# Altium PCB LCboardPCB3.PcbDoc
Units mil, origin at the board's own origin, x right, y up, seen from the top; angles counter-clockwise.
Board outline 1690 x 3845 mil, 6 copper layers (Top Layer, Mid-Layer 1, Internal Plane 1, Internal Plane 2, Mid-Layer 2, Bottom Layer), stack 61.2 mil thick; 28 components, 47 nets, 339 pads, 0 vias.
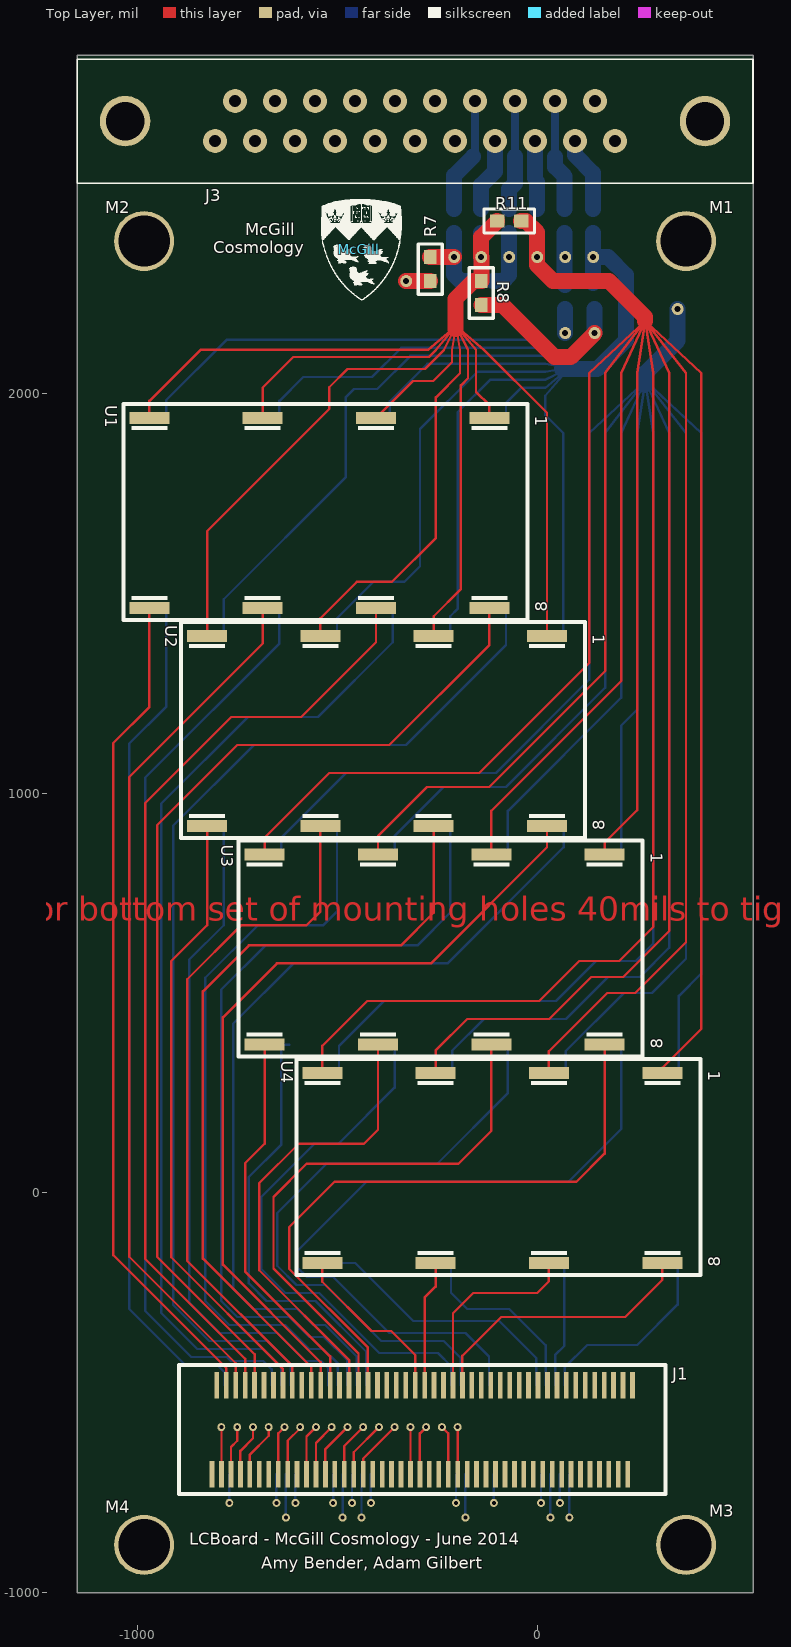
[diagram p0: Top Layer view]
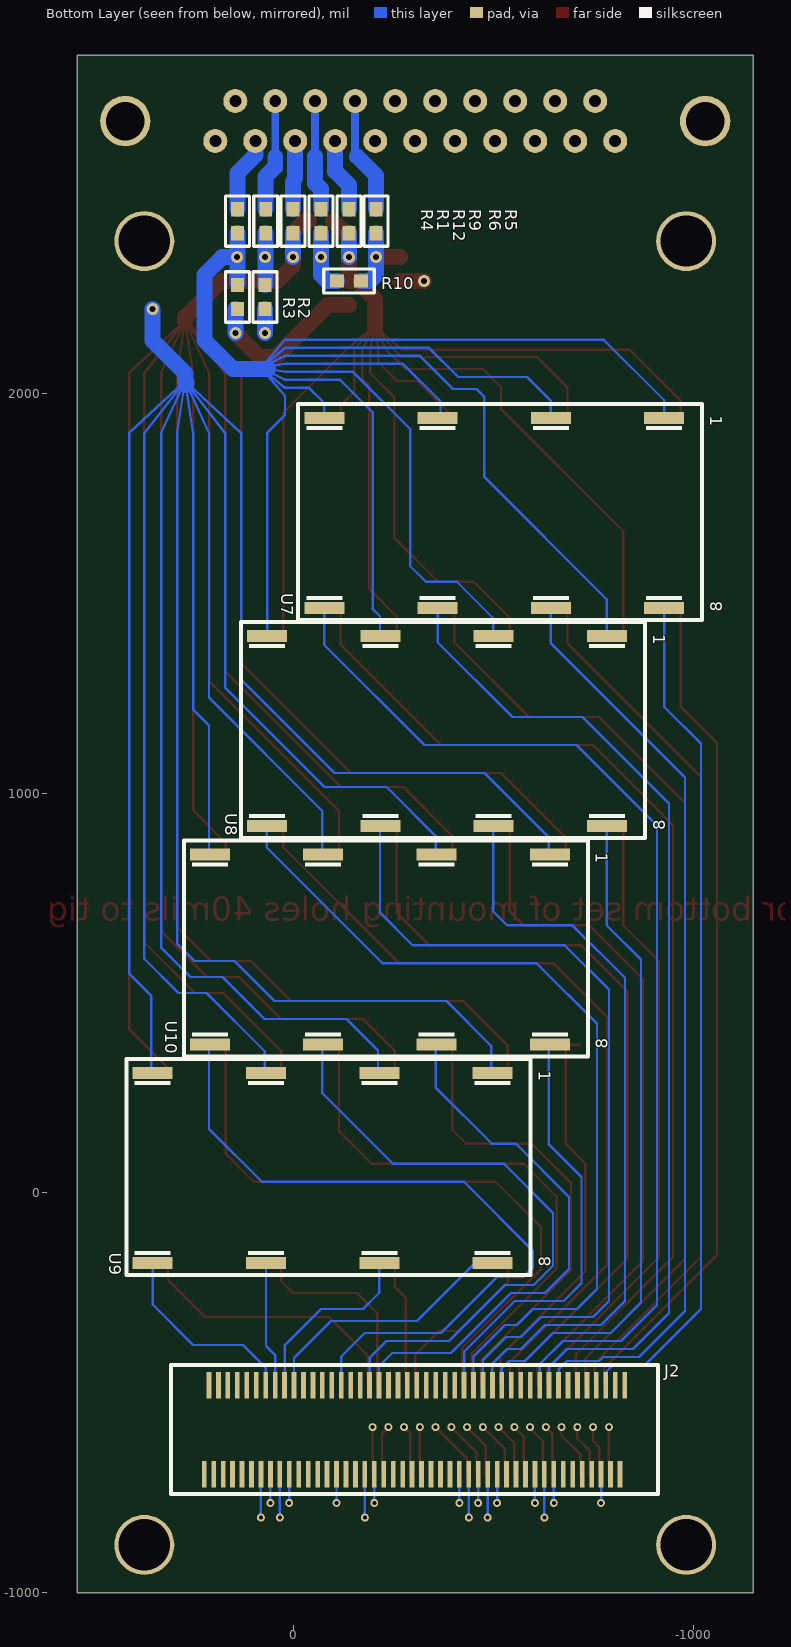
[diagram p1: Bottom Layer view, seen from below]
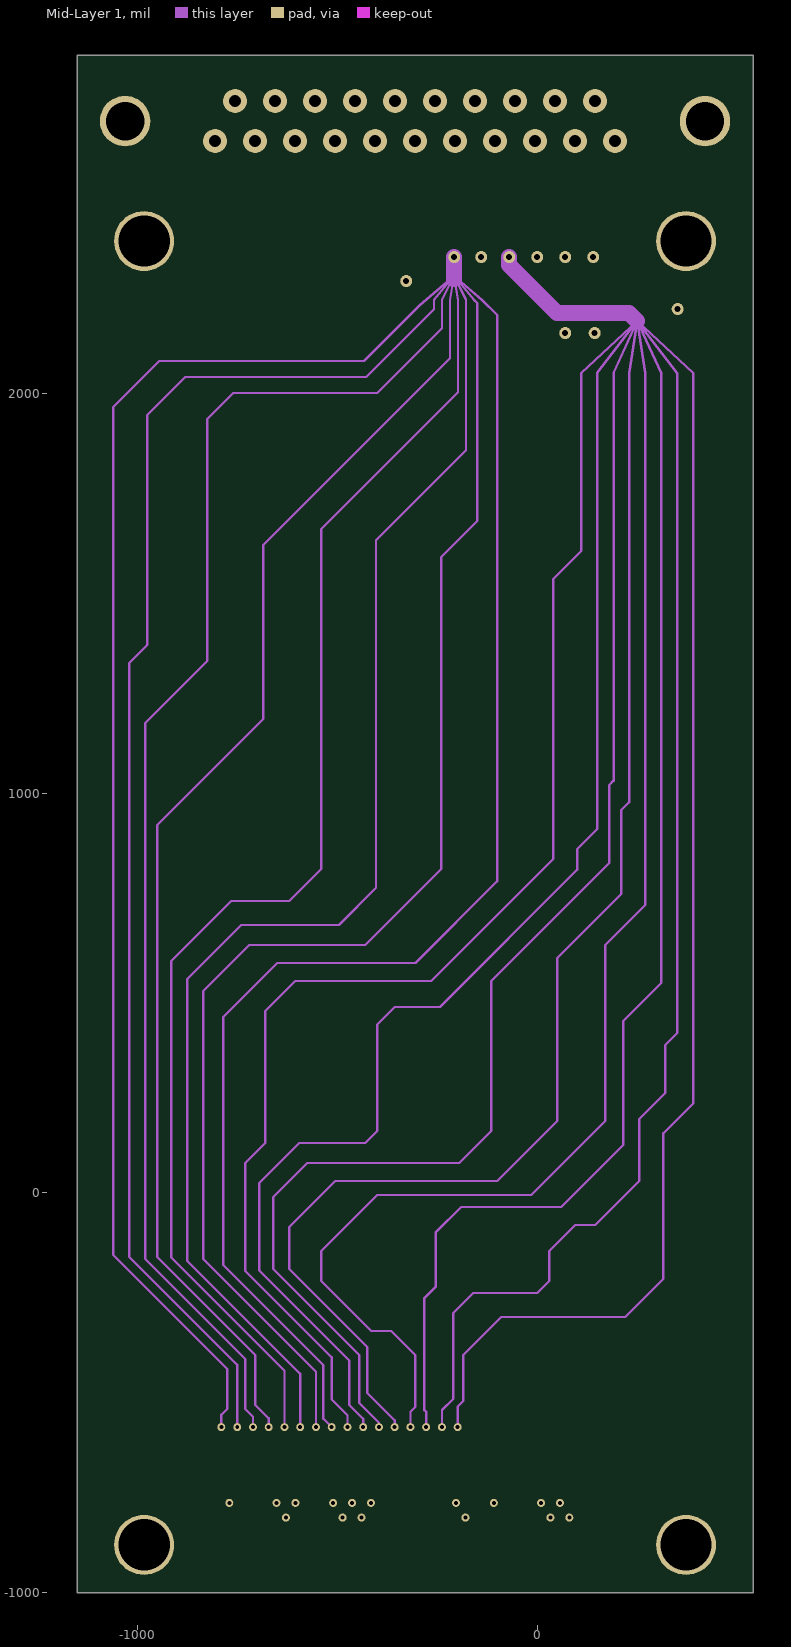
[diagram p2: Mid-Layer 1]
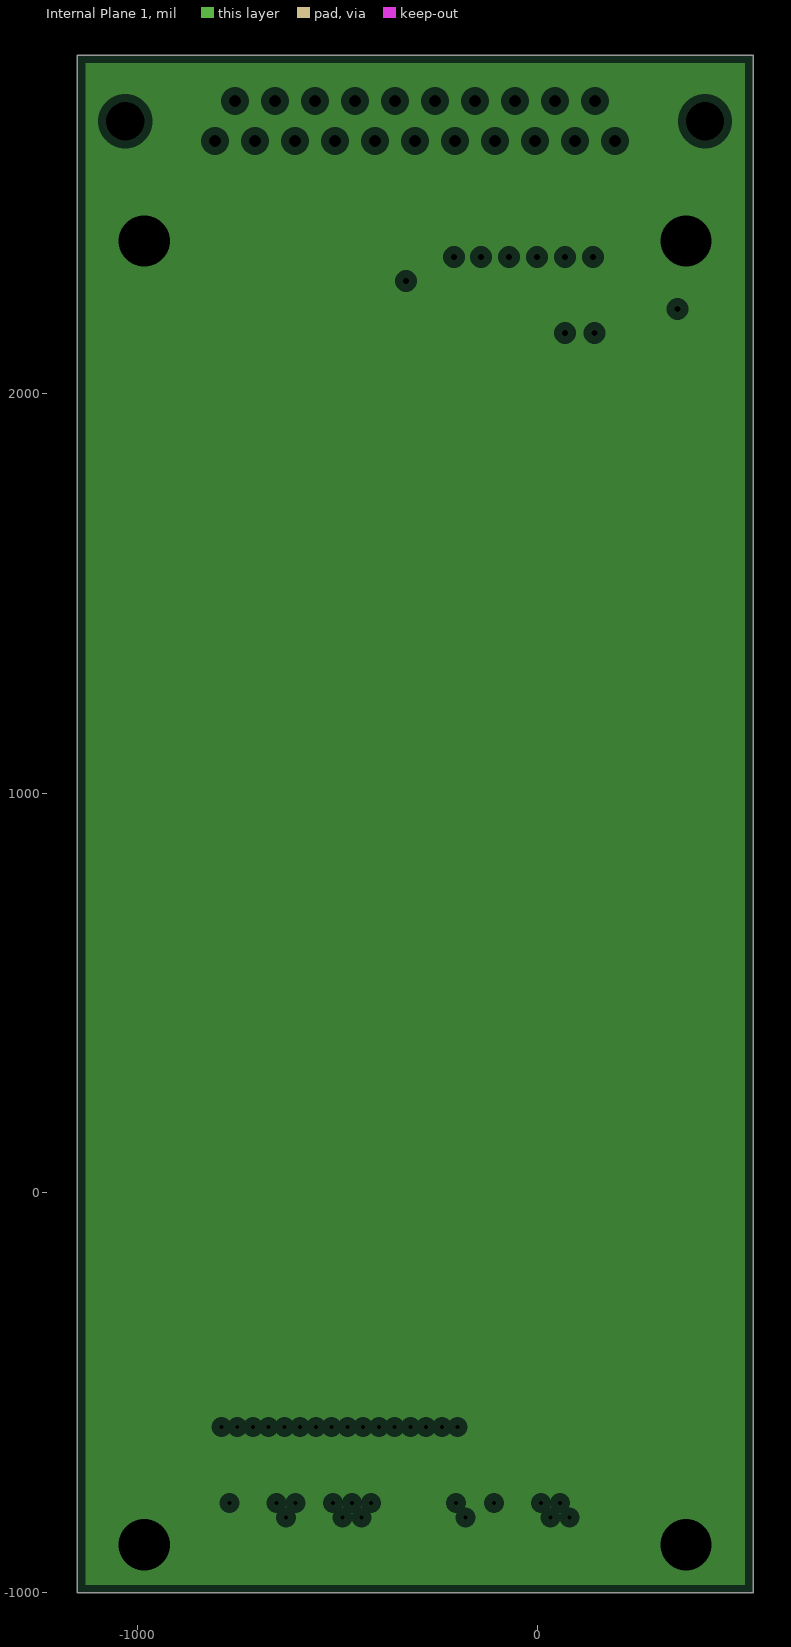
[diagram p3: Internal Plane 1, clearances drawn from the general rule]
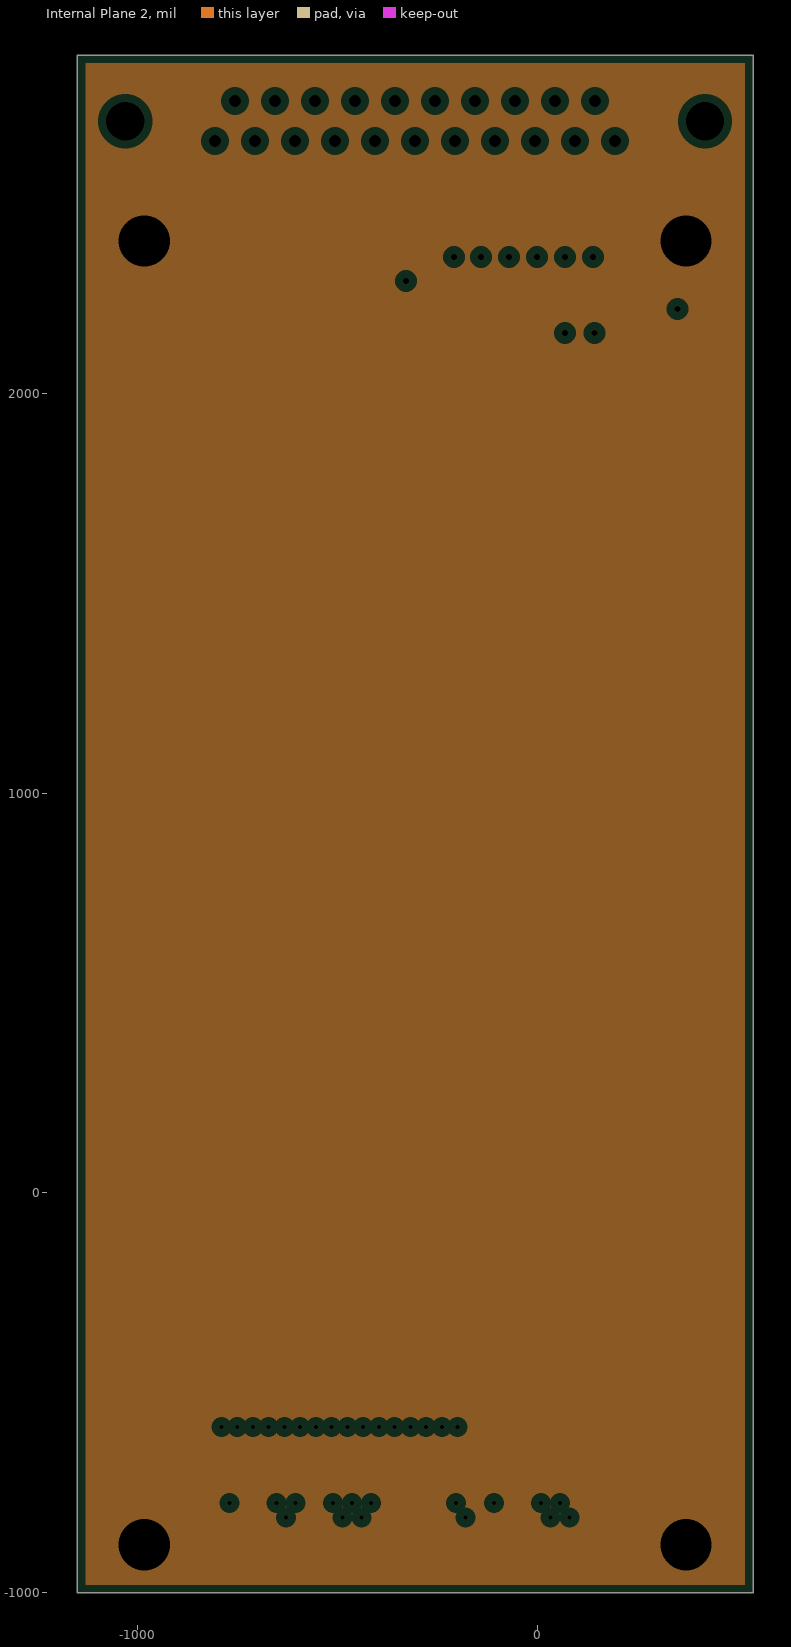
[diagram p4: Internal Plane 2, clearances drawn from the general rule]
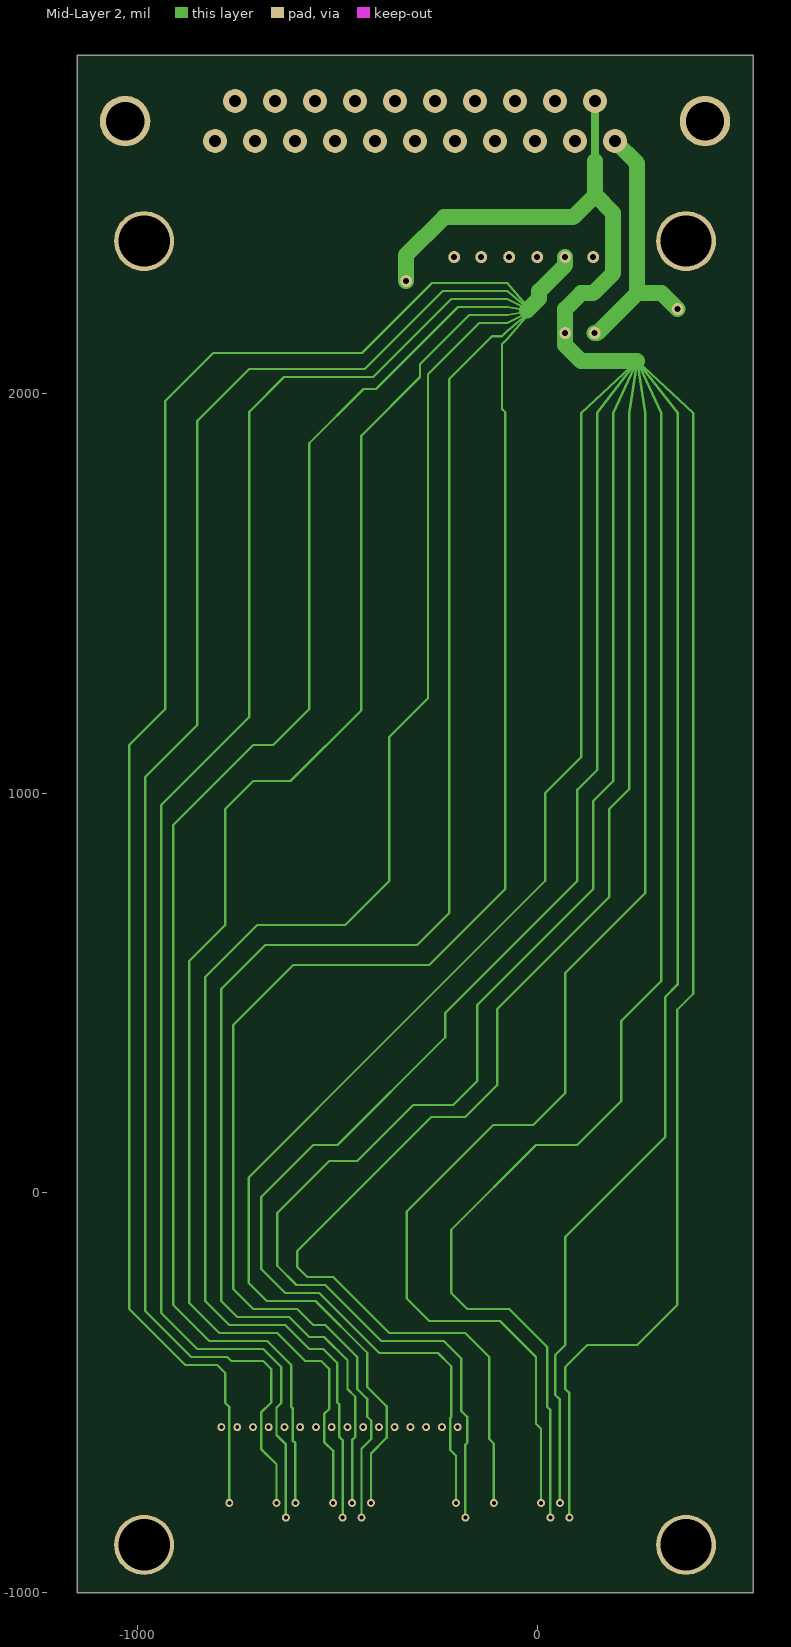
[diagram p5: Mid-Layer 2]

## Layer stack, top to bottom
Top Solder: solder mask 0.4, Solder Resist, Dk 3.5
Top Layer: signal copper 1.4
Dielectric1: core 12.6, FR-4, Dk 4.8
Mid-Layer 1: signal copper 1.4
Dielectric2: prepreg 12.6, FR-4, Dk 4.8
Internal Plane 1: plane copper 1.4, net GND
Dielectric5: core 10, FR-4, Dk 4.2
Internal Plane 2: plane copper 1.4, net GND
Dielectric 6: prepreg 5, Dk 4.2
Mid-Layer 2: signal copper 1.4
Dielectric3: core 12.6, FR-4, Dk 4.8
Bottom Layer: signal copper 1.4
Bottom Solder: solder mask 0.4, Solder Resist, Dk 3.5

## Board outline
-1150,-1000 540,-1000 540,2845 -1150,2845

## Design rules (kind name [scope] priority, off if disabled: settings)
Clearance [All] p1: gap=6
ComponentClearance [All] p1: gap=9 collisioncheckmode=3 verticalgap=10 showdistances=FALSE
HoleSize [All] p1: absolutevalues=TRUE maxlimit=200 minlimit=1 maxpercent=80.000 minpercent=20.000
HoleToHoleClearance [All] p1: gap=5 allowstackedmicrovias=TRUE
MinimumSolderMaskSliver [All] p1: minsoldermaskwidth=4
PlaneClearance [All] p1: clearance=20
PlaneConnect [All] p1: planeconnectstyle=Relief reliefexpansion=20 reliefentries=4 reliefconductorwidth=10 reliefairgap=10
PolygonConnect [All] p1: connectstyle=Relief reliefconductorwidth=10 reliefentries=4 polygonreliefangle="90 Angle" airgapwidth=10
RoutingVias [All] p1: holewidth=14.17 width=28.35 viastyle="Through Hole" minholewidth=14.17 minwidth=28.35 maxholewidth=28 maxwidth=50
SilkToSilkClearance [All] p1 off: silktosilkclearance=5
SilkToSolderMaskClearance SilkscreenOverComponentPads [IsPad] p1: minsilkscreentomaskgap=5 clearancetoexposedcopper=TRUE
SolderMaskExpansion [All] p1: expansion=3.5
UnpouredPolygon [All] p1: allowunpoured=FALSE
Width [All] p1: maxlimit=100 minlimit=6 preferedwidth=6
21 further rules are at their usual default settings.

## Classes and differential pairs
component class LCboardRev3: J3 M1 M2 M3 M4 R5 R6 R7 R8
component class S1: a6g a6h J1 R1_S1 R2_S1 R3_S1 R9 R10 R11 R12 U1 U2 u2 U3 U4
component class S2: J2 R1 R2 R3 R4 U7 U8 U9 U10

## Components (designator, comment, footprint, x,y, rotation, side; value= is the part's Value field where it differs from the comment)
J1 "ZIF Connector" LCBoard_ZIFCon#1 -813,-670 r0 top
J2 "ZIF Connector" LCBoard_ZIFCon#2 222,-670 r180 bottom
J3 "Glenair MWDM2L-21SBSP-.110" MicroD21Glenair-Vert2row 194.5,2630 r0 top
M1 "MountingHole" MountingHole 372,2380 r0 top
M2 "MountingHole" MountingHole -983,2380 r0 top
M3 "MountingHole" MountingHole 372,-880 r0 top
M4 "MountingHole" MountingHole -983,-880 r0 top
McGill "Comment" McGillLogo2 -445,2360 r0 top
R1 "0603" 0603 68.26,2400 r90 bottom
R2 "0603" 0603 70,2210 r90 bottom
R3 "0603" 0603 138.69,2270 r270 bottom
R4 "0603" 0603 139.13,2400 r90 bottom
R5 "0603" 0603 -207.48,2400 r90 bottom
R6 "0603" 0603 -140,2400 r90 bottom
R7 "0603" 0603 -267.48,2340 r270 top
R8 "0603" 0603 -139.77,2280 r270 top
R9 "0603" 0603 -70,2400 r90 bottom
R10 "0603" 0603 -170,2280 r0 bottom
R11 "0603" 0603 -40,2430 r180 top
R12 "0603" 0603 0,2400 r90 bottom
U1 "LC_wafer" LCWAFER -24.7,1513 r180 top
U2 "LC_wafer" LCWAFER 119.4,967 r180 top
U3 "LC_wafer" LCWAFER 263.5,421 r180 top
U4 "LC_wafer" LCWAFER 407.6,-125 r180 top
U7 "LC_wafer" LCWAFER -1023,1513 r0 bottom
U8 "LC_wafer" LCWAFER -880,967 r0 bottom
U9 "LC_wafer" LCWAFER -594,-125 r0 bottom
U10 "LC_wafer" LCWAFER -737,421 r0 bottom

## Footprints (in the part's own frame and the unit in brackets; to place one, negate y for a bottom-side part, rotate by r counter-clockwise, add the part's x,y. Pads: shape width x height; smd on the part's side, far side on the other; paste and mask are expansions set on the pad)
0603 [mil]
  rect 36x32 smd: 1(0,0) 2(60,0)
  silkscreen extent -33,-30 93,30
LCBoard_ZIFCon#1 [mm] "HFP190CT-ND"
  rect 0.3x1.7 smd: 1(0,-0.85) 2(0.3,4.8) 3(0.6,-0.85) 4(0.9,4.8) 5(1.2,-0.85) 6(1.5,4.8) 7(1.8,-0.85) 8(2.1,4.8) 9(2.4,-0.85) 10(2.7,4.8) 11(3,-0.85) 12(3.3,4.8) 13(3.6,-0.85) 14(3.9,4.8) 15(4.2,-0.85) 16(4.5,4.8) 17(4.8,-0.85) 18(5.1,4.8) 19(5.4,-0.85) 20(5.7,4.8) 21(6,-0.85) 22(6.3,4.8) 23(6.6,-0.85) 24(6.9,4.8) 25(7.2,-0.85) 26(7.5,4.8) 27(7.8,-0.85) 28(8.1,4.8) 29(8.4,-0.85) 30(8.7,4.8) 31(9,-0.85) 32(9.3,4.8) 33(9.6,-0.85) 34(9.9,4.8) 35(10.2,-0.85) 36(10.5,4.8) 37(10.8,-0.85) 38(11.1,4.8) 39(11.4,-0.85) 40(11.7,4.8) 41(12,-0.85) 42(12.3,4.8) 43(12.6,-0.85) 44(12.9,4.8) 45(13.2,-0.85) 46(13.5,4.8) 47(13.8,-0.85) 48(14.1,4.8) 49(14.4,-0.85) 50(14.7,4.8) 51(15,-0.85) 52(15.3,4.8) 53(15.6,-0.85) 54(15.9,4.8) 55(16.2,-0.85) 56(16.5,4.8) 57(16.8,-0.85) 58(17.1,4.8) 59(17.4,-0.85) 60(17.7,4.8) 61(18,-0.85) 62(18.3,4.8) 63(18.6,-0.85) 64(18.9,4.8) 65(19.2,-0.85) 66(19.5,4.8) 67(19.8,-0.85) 68(20.1,4.8) 69(20.4,-0.85) 70(20.7,4.8) 71(21,-0.85) 72(21.3,4.8) 73(21.6,-0.85) 74(21.9,4.8) 75(22.2,-0.85) 76(22.5,4.8) 77(22.8,-0.85) 78(23.1,4.8) 79(23.4,-0.85) 80(23.7,4.8) 81(24,-0.85) 82(24.3,4.8) 83(24.6,-0.85) 84(24.9,4.8) 85(25.2,-0.85) 86(25.5,4.8) 87(25.8,-0.85) 88(26.1,4.8) 89(26.4,-0.85) 90(26.7,4.8)
  round 0.5 on Top Overlay: 2(-2.3,-2.4)
  silkscreen extent -2.1,-2.1 28.8,6.1
LCBoard_ZIFCon#2 [mm]
  rect 0.3x1.7 smd: 1(0,-0.85) 2(0.3,4.8) 3(0.6,-0.85) 4(0.9,4.8) 5(1.2,-0.85) 6(1.5,4.8) 7(1.8,-0.85) 8(2.1,4.8) 9(2.4,-0.85) 10(2.7,4.8) 11(3,-0.85) 12(3.3,4.8) 13(3.6,-0.85) 14(3.9,4.8) 15(4.2,-0.85) 16(4.5,4.8) 17(4.8,-0.85) 18(5.1,4.8) 19(5.4,-0.85) 20(5.7,4.8) 21(6,-0.85) 22(6.3,4.8) 23(6.6,-0.85) 24(6.9,4.8) 25(7.2,-0.85) 26(7.5,4.8) 27(7.8,-0.85) 28(8.1,4.8) 29(8.4,-0.85) 30(8.7,4.8) 31(9,-0.85) 32(9.3,4.8) 33(9.6,-0.85) 34(9.9,4.8) 35(10.2,-0.85) 36(10.5,4.8) 37(10.8,-0.85) 38(11.1,4.8) 39(11.4,-0.85) 40(11.7,4.8) 41(12,-0.85) 42(12.3,4.8) 43(12.6,-0.85) 44(12.9,4.8) 45(13.2,-0.85) 46(13.5,4.8) 47(13.8,-0.85) 48(14.1,4.8) 49(14.4,-0.85) 50(14.7,4.8) 51(15,-0.85) 52(15.3,4.8) 53(15.6,-0.85) 54(15.9,4.8) 55(16.2,-0.85) 56(16.5,4.8) 57(16.8,-0.85) 58(17.1,4.8) 59(17.4,-0.85) 60(17.7,4.8) 61(18,-0.85) 62(18.3,4.8) 63(18.6,-0.85) 64(18.9,4.8) 65(19.2,-0.85) 66(19.5,4.8) 67(19.8,-0.85) 68(20.1,4.8) 69(20.4,-0.85) 70(20.7,4.8) 71(21,-0.85) 72(21.3,4.8) 73(21.6,-0.85) 74(21.9,4.8) 75(22.2,-0.85) 76(22.5,4.8) 77(22.8,-0.85) 78(23.1,4.8) 79(23.4,-0.85) 80(23.7,4.8) 81(24,-0.85) 82(24.3,4.8) 83(24.6,-0.85) 84(24.9,4.8) 85(25.2,-0.85) 86(25.5,4.8) 87(25.8,-0.85) 88(26.1,4.8) 89(26.4,-0.85) 90(26.7,4.8)
  round 0.5 on Bottom Overlay: 2(-2.3,-2.4)
  silkscreen extent -2.1,-2.1 28.8,6.1
LCWAFER [mil]
  rect 100x30 smd paste-500 mask-500: 1(95,-425) 2(378.3,-425) 3(661.6,-425) 4(944.9,-425) 5(944.9,50) 6(661.6,50) 7(378.3,50) 8(95,50)
  silkscreen extent 0,-460 1010,80
McGillLogo2 [mil] "McGillLogo"
  silkscreen extent -95,-127 106,124
MicroD21Glenair-Vert2row [mil]
  round 60 hole 30: 1(0,0) 2(-100,0) 3(-200,0) 4(-300,0) 5(-400,0) 6(-500,0) 7(-600,0) 8(-700,0) 9(-800,0) 10(-900,0) 11(-1000,0) 12(-50,100) 13(-150,100) 14(-250,100) 15(-350,100) 16(-450,100) 17(-550,100) 18(-650,100) 19(-750,100) 20(-850,100) 21(-950,100)
  round 125.98 hole 96.06: MH1(225,50) MH2(-1225,50)
  silkscreen extent -1345,-105 345,205
MountingHole [mil]
  round 150 hole 128.5: 0(0,0)

## Part data
J1 J2: library part LCboard_FH16-90S-0.3SHW(05)
J3: library part "GlenairMicroDsub21 -2 row", "GlenairMicroDsub21 -2 row"
R1 R2 R3 R4 R5 R6 R7 R8 R9 R10 R11 R12: library part Res0603, "RES 1 OHM 1/10W 1% 0603 SMD"
U1 U2 U3 U4 U7 U8 U9 U10: library part LCWafer, "Gold bonded integrated LC"

## Free pads (board coordinates)
  round 20 hole 10: 0(-790,-585.44) 0(-770,-775) 0(-750.01,-585.44) 0(-710.64,-585.44) 0(-671.27,-585.44) 0(-651.89,-775) 0(-631.9,-585.44) 0(-628.39,-811.61) 0(-604.65,-775) 0(-592.53,-585.44) 0(-553.16,-585.44) 0(-513.79,-585.44) 0(-510.16,-775) 0(-486.66,-811.61) 0(-474.42,-585.44) 0(-462.91,-775) 0(-439.42,-811.61) 0(-435.05,-585.44) 0(-415.67,-775) 0(-395.68,-585.44) 0(-356.31,-585.44) 0(-316.94,-585.44) 0(-277.57,-585.44) 0(-238.2,-585.44) 0(-203.07,-775) 0(-198.83,-585.44) 0(-179.57,-811.61) 0(-108.58,-775) 0(9.53,-775) 0(33.02,-811.61) 0(56.77,-775) 0(80.27,-811.61)
  round 30 hole 15: 0(-327.48,2280) 0(-207.48,2340) 0(-140,2340) 0(-70,2340) 0(0,2340) 0(70,2150) 0(70,2340) 0(140,2340) 0(143.69,2150) 0(350.9,2210)

## Nets (pads, with @x,y where several pads share a name; then routed paths per layer and width w, separated by ;. In a path a pad name is that pad's centre, name@x,y a point inside that pad or via, vN(x,y) a via of type N, cw(c..) or ccw(c..) an arc to the next point about the centre after c; other vN are vias at no path point)
GND: M1.0 M2.0 M3.0 M4.0
NetJ1_3: J1.3 J1.5 J1.7 J1.9 J1.15 J1.17 J1.21 J1.23 pad.0@-207.48,2340 pad.0@-513.79,-585.44 pad.0@-553.16,-585.44 pad.0@-592.53,-585.44 pad.0@-631.9,-585.44 pad.0@-671.27,-585.44 pad.0@-710.64,-585.44 pad.0@-750.01,-585.44 pad.0@-790,-585.44 R5.1 R7.1 R10.1 | length 29161.3
  Top Layer w6: J1.3 pad.0@-789.38,-585.44 ; J1.5 -765.76,-635.44 -750.01,-619.69 pad.0@-750.01,-585.44 ; J1.7 -742.13,-644.76 -710.64,-613.27 pad.0@-710.64,-585.44 ; J1.9 -718.51,-654.14 -671.27,-606.9 pad.0@-671.27,-585.44 ; J1.15 -647.65,-601.19 pad.0@-631.9,-585.44 ; J1.17 -624.02,-619.65 -592.53,-588.16 pad.0@-592.53,-585.44 ; J1.21 -576.78,-609.06 pad.0@-553.16,-585.44 ; J1.23 -553.16,-624.81 pad.0@-513.79,-585.44
  Top Layer w40: R7.1 pad.0@-207.48,2340
  Mid-Layer 1 w6: pad.0@-790,-585.44 -790,-555 -775,-540 -775,-440 -1060,-155 -1060,1965 -945,2080 -433.17,2080 -293.17,2220 -208,2293 ; pad.0@-750.01,-585.44 -750.01,-429.99 -1020,-160 -1020,1325 -975,1370 -975,1945 -880,2040 -427.48,2040 -258,2209.48 -258,2233 -208,2293 ; pad.0@-710.64,-585.44 -710.64,-559.36 -730,-540 -730,-415 -980,-165 -980,1175 -825,1330 -825,1935 -760,2000 -400,2000 -238,2162 -238,2233 -208,2293 ; pad.0@-671.27,-585.44 -671.27,-563.73 -705,-530 -705,-405 -950,-160 -950,920 -685,1185 -685,1620 -218,2087 -218,2233 -208,2293 ; pad.0@-631.9,-585.44 -631.9,-444.37 -915,-161.27 -915,580 -765,730 -620,730 -540,810 -540,1660 -198,2002 -198,2233 -207.48,2289.89 -208,2293 ; pad.0@-592.53,-585.44 -592.53,-452.47 -875,-170 -875,535 -740,670 -496,670 -403,763 -403,1632 -178,1857 -178,2233 -207.48,2291.96 -208,2293 ; pad.0@-553.16,-585.44 -553.16,-446.84 -835,-165 -835,505 -720,620 -430,620 -240,810 -240,1590 -150,1680 -150,2225 -158,2233 -207.48,2292.38 -208,2293 ; pad.0@-513.79,-585.44 -535,-564.23 -535,-430 -785,-180 -785,440 -650,575 -304.7,575 -100,779.7 -100,2195 -138,2233 -207.48,2292.56 -208,2293
  Mid-Layer 1 w40: -207.48,2285 pad.0@-207.48,2340
  Bottom Layer w40: R5.1 -207.48,2340 -207.48,2296.1 -191.39,2280 R10.1
NetJ1_4: J1.4 U1.5 | length 2098.5
  Top Layer w6: U1.5 -969.6,1215.4 -1060,1125 -1060,-155.5 -777.57,-437.93 J1.4
NetJ1_6: J1.6 U1.6 | length 2192.5
  Top Layer w6: J1.6 -753.94,-425.66 -1020,-159.6 -1020,1040 -686.3,1373.7 U1.6
NetJ1_8: J1.8 U1.7 | length 2389
  Top Layer w6: J1.8 -730.32,-414.68 -980,-165 -980,975 -765,1190 -590,1190 -403,1377 U1.7
NetJ1_10: J1.10 U1.8 | length 2611.3
  Top Layer w6: J1.10 -706.7,-403.3 -950,-160 -950,920 -750,1120 -370,1120 -119.7,1370.3 U1.8
NetJ1_16: J1.16 U2.5 | length 1550.7
  Top Layer w6: U2.5 -825.5,669.4 -915,579.9 -915,-160.83 -635.83,-440 J1.16
NetJ1_18: J1.18 U2.6 | length 1740.3
  Top Layer w6: J1.18 -612.21,-432.79 -875,-170 -875,534.5 -740.5,669 -577.3,669 -542.2,704.1 U2.6
NetJ1_22: J1.22 U2.7 | length 1971.8
  Top Layer w6: J1.22 -564.97,-435.03 -835.9,-164.1 -835.9,504 -720.9,619 -340.9,619 -258.9,701 U2.7
NetJ1_24: J1.24 U2.8 | length 2060.4
  Top Layer w6: J1.24 -541.35,-423.65 -785.9,-179.1 -785.9,439 -650.9,574 -266,574 24.4,864.4 U2.8
NetJ1_25: J1.25 J1.29 J1.31 J1.33 J1.43 J1.45 J1.51 J1.53 pad.0@-70,2340 pad.0@-198.83,-585.44 pad.0@-238.2,-585.44 pad.0@-277.57,-585.44 pad.0@-316.94,-585.44 pad.0@-356.31,-585.44 pad.0@-395.68,-585.44 pad.0@-435.05,-585.44 pad.0@-474.42,-585.44 R9.1 R10.2 | length 28485.3
  Top Layer w6: J1.25 -529.54,-640.56 pad.0@-474.42,-585.44 ; J1.29 -482.29,-632.68 pad.0@-435.05,-585.44 ; J1.31 -458.67,-648.43 pad.0@-395.68,-585.44 ; J1.33 -435.05,-664.18 pad.0@-356.31,-585.44 ; J1.43 pad.0@-316.94,-585.44 ; J1.45 -293.32,-601.19 pad.0@-277.57,-585.44 ; pad.0@-238.2,-585.44 -222.45,-601.19 J1.51 ; J1.53 pad.0@-198.83,-585.44
  Mid-Layer 1 w6: pad.0@-474.42,-585.44 -474.42,-555.58 -513.79,-516.21 -513.79,-411.21 -730,-195 -730,75 -680,125 -680,455 -605,530 -265,530 40,835 40,1535 110,1605 110,2050 250,2180 ; pad.0@-435.05,-585.44 -435.05,-564.95 -470,-530 -470,-418.79 -695,-193.79 -695,25 -595,125 -430,125 -400,155 -400,421.31 -356.31,465 -243.4,465 100,808.4 100,860 150,910 150,2050 250,2180 ; pad.0@-395.68,-585.44 -395.68,-574.32 -445,-525 -445,-405 -660,-190 -660,-10 -575,75 -195,75 -115,155 -115,530 180,825 180,1020 190.94,1030.94 190.94,2050 250,2180 ; pad.0@-356.31,-585.44 -356.31,-568.69 -425,-500 -425,-385 -620,-190 -620,-85 -505,30 -100,30 50,180 50,587.4 210,747.4 210,957.1 230,977.1 230,2050 250,2180 ; pad.0@-316.94,-585.44 -316.94,-546.94 -305,-535 -305,-405 -365,-345 -415,-345 -540,-220 -540,-145 -400,-5 -15,-5 170,180 170,620 270,720 270,2050 250,2180 ; pad.0@-277.57,-585.44 -277.57,-547.43 -282,-543 -282,-263 -254,-235 -254,-99 -190,-35 60,-35 215,120 215,430 310,525 310,2050 250,2180 ; pad.0@-238.2,-585.44 -238.2,-543 -210,-514.8 -210,-300 -160,-250 0,-250 30,-220 30,-145 95,-80 145,-80 255,30 255,185 320,250 320,370 350,400 350,2050 250,2180 ; pad.0@-198.83,-585.44 -198.83,-533.83 -185,-520 -185,-405 -90,-310 220,-310 315,-215 315,149.1 390,224.1 390,2050 250,2180
  Mid-Layer 1 w40: pad.0@-70,2340 -70,2319.53 49.53,2200 230,2200 250,2180
  Bottom Layer w40: R10.2 -85.09,2280 -70,2295.09 -70,2340 R9.1
NetJ1_26: J1.26 U3.5 | length 1015.3
  Top Layer w6: U3.5@-716.4,371 U3.5@-661.4,371 ; U3.5 -681.4,123.4 -730.32,74.48 -730.32,-196.08 -517.72,-408.68 J1.26
NetJ1_30: J1.30 U3.6 | length 1163.5
  Top Layer w6: J1.30 -470.48,-417.74 -694.89,-193.33 -694.89,24.51 -596.4,123 -433.2,123 -398.1,158.1 U3.6
NetJ1_32: J1.32 U3.7 | length 1388.3
  Top Layer w6: J1.32 -446.86,-401.14 -659.46,-188.54 -659.46,-9.66 -576.8,73 -196.8,73 -114.8,155 U3.7
NetJ1_34: J1.34 U3.8 | length 1614.5
  Top Layer w6: J1.34 -423.24,-386.76 -620,-190 -620,-85.2 -506.8,28 98.2,28 168.5,98.3 U3.8
NetJ1_44: J1.44 U4.5 | length 430.9
  Top Layer w6: U4.5 -537.3,-221.8 -414.1,-345 -365.13,-345 -305.13,-405 J1.44
NetJ1_46: J1.46 U4.6 | length 317.4
  Top Layer w6: J1.46 -281.5,-261.5 -254,-234 U4.6
NetJ1_52: J1.52 U4.7 | length 499.1
  Top Layer w6: J1.52 -210.64,-300.64 -160,-250 0,-250 29.3,-220.7 U4.7
NetJ1_54: J1.54 U4.8 | length 694.6
  Top Layer w6: J1.54 -187.02,-407.02 -90,-310 220,-310 312.6,-217.4 U4.8
NetJ2_13: J2.13 J2.15 J2.17 J2.19 J2.29 J2.35 J2.37 J2.55 J3.12 pad.0@9.53,-775 pad.0@33.02,-811.61 pad.0@56.77,-775 pad.0@70,2150 pad.0@80.27,-811.61 pad.0@-108.58,-775 pad.0@-179.57,-811.61 pad.0@-203.07,-775 pad.0@-327.48,2280 pad.0@-415.67,-775 R2.1 R7.2 | length 29620.9
  Top Layer w40: pad.0@-327.48,2280 R7.2
  Mid-Layer 2 w6: pad.0@-415.67,-775 -415.67,-651.02 -376.68,-612.03 -376.68,-533.32 -425,-485 -425,-399.42 -554.42,-270 -676.4,-270 -721.3,-225.1 -721.3,38.7 -550,210 -550,210.7 20,780.7 20,1000 110,1090 110,1950 250,2080 ; pad.0@-203.07,-775 -203.07,-656.93 -217.83,-642.17 -217.83,-562.83 -215,-560 -215,-433.2 -248.2,-400 -395,-400 -545,-250 -630,-250 -690,-190 -690,-10 -560,120 -499.42,120 -230,389.42 -230,450 100,780 100,1007.92 150,1057.92 150,1950 250,2080 ; pad.0@-179.57,-811.61 -179.57,-629.57 -175,-625 -175,-560 -190,-545 -190,-413.83 -233.83,-370 -390,-370 -530,-230 -601.9,-230 -650,-181.9 -650,-50 -520,80 -450,80 -310,220 -210,220 -150,280 -150,470 140,760 140,980 190,1030 190,1950 250,2080 ; pad.0@-108.58,-775 -108.58,-626.42 -120,-615 -120,-410 -180,-350 -370.1,-350 -510.1,-210 -575,-210 -600,-185 -600,-145 -265,190 -180,190 -100,270 -100,460 180,740 180,960 230,1010 230,1950 250,2080 ; pad.0@9.53,-775 9.53,-589.53 -3,-577 -3,-410 -93,-320 -270,-320 -326.4,-263.6 -326.4,-46.4 -110,170 -10,170 70,250 70,550 270,750 270,1950 250,2080 ; pad.0@33.02,-811.61 33.02,-543.02 25,-535 25,-385 -70,-290 -175,-290 -215,-250 -215,-92 -3,120 100,120 210,230 210,430 310,530 310,1950 250,2080 ; pad.0@56.77,-775 56.77,-516.77 45,-505 45,-405 70,-380 70,-110 320,140 320,490 350.9,520.9 350.9,1951.4 250,2080 ; pad.0@80.27,-811.61 80.27,-500.27 70,-490 70,-435 125,-380 250,-380 350,-280 350,458 390,498 390,1950 250,2080
  Mid-Layer 2 w20: 144.5,2580 J3.12
  Mid-Layer 2 w40: pad.0@-327.48,2280 -327.48,2345.52 -233,2440 90,2440 144.5,2494.5 144.5,2495.5 ; 144.5,2580 144.5,2495.5 ; 250,2080 110,2080 70,2120 70,2150 70,2210 110,2250 140,2250 190,2300 190,2450 144.5,2495.5
  Bottom Layer w6: pad.0@-415.8,-774.87 J2.55 ; pad.0@-203.2,-774.87 J2.37 ; pad.0@-179.57,-811.61 J2.35 ; pad.0@-108.71,-774.87 J2.29 ; pad.0@9.4,-774.87 J2.19 ; pad.0@33.02,-811.61 J2.17 ; pad.0@56.65,-774.87 J2.15 ; pad.0@80.27,-811.61 J2.13
  Bottom Layer w40: pad.0@70,2150 R2.1
NetJ2_14: J2.14 U9.5 | length 496.2
  Bottom Layer w6: J2.14 68.46,-436.54 125,-380 250,-380 350.9,-279.1 U9.5
NetJ2_16: J2.16 U9.6 | length 315.5
  Bottom Layer w6: J2.16 44.83,-405 67.6,-382.23 U9.6
NetJ2_18: J2.18 U9.7 | length 465.7
  Bottom Layer w6: U9.7 -215.7,-249.3 -175,-290 -70,-290 21.21,-381.21 J2.18
NetJ2_20: J2.20 U9.8 | length 663.4
  Bottom Layer w6: U9.8 -464,-175 -455,-175 -310,-320 -95,-320 -2.41,-412.59 J2.20
NetJ2_30: J2.30 U10.5 | length 1832.3
  Bottom Layer w6: J2.30 -120.52,-408.9 -179.42,-350 -370,-350 -510,-210 -575.95,-210 -600,-185.95 -600,-145 -427,28 78,28 210.1,160.1 U10.5@210.1,371
NetJ2_36: J2.36 U10.6 | length 1576.8
  Bottom Layer w6: J2.36 -191.39,-412.44 -233.83,-370 -390,-370 -530,-230 -601.9,-230 -650,-181.9 -650,-50 -527,73 -250,73 -73.2,249.8 U10.6@-73.2,371
NetJ2_38: J2.38 U10.7 | length 1357.8
  Bottom Layer w6: U10.7@-356.5,371 -356.5,263.5 -497,123 -557,123 -690,-10 -690,-190 -630,-250 -545,-250 -395,-400 -248.2,-400 -215.01,-433.19 J2.38
NetJ2_56: J2.56 U10.8 | length 1134.1
  Bottom Layer w6: U10.8@-674.8,371 U10.8@-619.8,371 ; U10.8@-639.8,371 -639.8,121.47 -721.3,39.97 -721.3,-225.39 -676.69,-270 -554.42,-270 -427.61,-396.81 J2.56
NetJ2_57: J2.57 J2.59 J2.61 J2.63 J2.71 J2.73 J2.75 J2.85 pad.0@70,2340 pad.0@-439.42,-811.61 pad.0@-462.91,-775 pad.0@-486.66,-811.61 pad.0@-510.16,-775 pad.0@-604.65,-775 pad.0@-628.39,-811.61 pad.0@-651.89,-775 pad.0@-770,-775 R1.1 R2.2 | length 31712.5
  Mid-Layer 2 w6: pad.0@-770,-775 -770,-535 -780,-525 -780,-450 -800,-430 -880,-430 -1020,-290 -1020,1120 -930,1210 -930,1980 -810,2100 -438,2100 -263,2275 -75,2275 -20.38,2211.28 -15,2205 ; pad.0@-651.89,-775 -651.89,-678.11 -690.27,-639.73 -690.27,-549 -665,-523.73 -665,-440 -685,-420 -765,-420 -775,-410 -865,-410 -980,-295 -980,1040 -850,1170 -850,1930 -720,2060 -431.28,2060 -236.28,2255 -75,2255 -21.36,2210.3 -15,2205 ; pad.0@-628.39,-811.61 -628.39,-628.5 -651.89,-605 -651.89,-536.89 -640,-525 -640,-435 -685,-390 -850,-390 -940,-300 -940,970 -720,1190 -720,1953 -633,2040 -410,2040 -215,2235 -75,2235 -22.78,2208.89 -15,2205 ; pad.0@-604.65,-775 -604.65,-625.35 -611.53,-618.47 -611.53,-538.47 -615,-535 -615,-430 -675,-370 -820,-370 -910,-280 -910,920 -710,1120 -660,1120 -570,1210 -570,1874.42 -434.42,2010 -403,2010 -198,2215 -75,2215 -25,2206.67 -15,2205 ; pad.0@-510.16,-775 -510.16,-644.84 -532.79,-622.21 -532.79,-552.79 -520,-540 -520,-440 -540,-420 -580,-420 -650,-350 -795,-350 -870,-275 -870,580 -780,670 -780,960 -710,1030 -616.7,1030 -440,1206.7 -440,1893 -293,2040 -293,2072 -170,2195 -75,2195 -15,2205 ; pad.0@-486.66,-811.61 -486.66,-618.34 -494.79,-610.21 -494.79,-577.36 -495,-577.15 -495,-528.73 -500,-523.73 -500,-425 -535,-390 -570,-390 -630,-330 -770,-330 -830,-270 -830,540 -700,670 -480,670 -370,780 -370,1140 -273,1237 -273,2047 -145,2175 -75,2175 -15,2205 ; pad.0@-462.91,-775 -462.91,-617.91 -455,-610 -455,-509.42 -474.42,-490 -474.42,-418.37 -532.79,-360 -570,-360 -620,-310 -750,-310 -790,-270 -790,510 -680,620 -300,620 -220,700 -220,2035 -113,2142 -88,2142 -75,2155 -15,2205 ; pad.0@-439.42,-811.61 -439.42,-639.42 -415,-615 -415,-569.67 -425,-559.67 -425,-515 -450,-490 -450,-410 -530,-330 -560,-330 -600,-290 -710,-290 -760,-240 -760,420 -610,570 -270,570 -80,760 -80,1951.8 -88,1959.8 -88,2122 -75,2135 -15,2205
  Mid-Layer 2 w40: -25,2206.67 5,2236.67 5,2255 70,2320 pad.0@70,2340
  Bottom Layer w6: J2.85 -770.13,-774.87 pad.0@-770,-775 ; pad.0@-652.02,-774.87 J2.75 ; pad.0@-628.39,-811.61 J2.73 ; pad.0@-604.77,-774.87 J2.71 ; pad.0@-510.28,-774.87 J2.63 ; pad.0@-486.66,-811.61 J2.61 ; pad.0@-463.04,-774.87 J2.59 ; pad.0@-439.42,-811.61 J2.57
  Bottom Layer w40: R1.1 68.26,2271.74 R2.2
NetJ2_58: J2.58 U8.5 | length 2175.5
  Bottom Layer w6: J2.58 -451.23,-408.77 -530,-330 -560,-330 -600,-290 -710,-290 -760,-240 -760,423.3 -609.3,574 -224.4,574 66,864.4 U8.5@66,917
NetJ2_60: J2.60 U8.6 | length 2086.3
  Bottom Layer w6: J2.60 -474.85,-417.94 -532.79,-360 -570,-360 -620,-310 -750,-310 -790,-270 -790,508.3 -679.3,619 -299.3,619 -217.3,701 U8.6@-217.3,917
NetJ2_62: J2.62 U8.7 | length 1869.9
  Bottom Layer w6: U8.7@-500.6,917 -500.6,704.1 -535.7,669 -698.9,669 -830,537.9 -830,-270 -770,-330 -630,-330 -570,-390 -535,-390 -498.47,-426.53 J2.62
NetJ2_64: J2.64 U8.8 | length 1685.7
  Bottom Layer w6: U8.8@-783.9,917 -783.9,669.4 -870,583.3 -870,-274.18 -794.18,-350 -650,-350 -580,-420 -540,-420 -522.09,-437.91 J2.64
NetJ2_72: J2.72 U7.5 | length 2717.7
  Bottom Layer w6: J2.72 -616.58,-428.42 -675,-370 -820,-370 -910,-280 -910,918.4 -708.4,1120 -328.4,1120 -78.1,1370.3 U7.5
NetJ2_74: J2.74 U7.6 | length 2506.9
  Bottom Layer w6: J2.74 -640.2,-434.94 -685.15,-390 -850,-390 -940,-300 -940,973.4 -723.4,1190 -548.4,1190 -361.4,1377 U7.6
NetJ2_76: J2.76 U7.7 | length 2313.5
  Bottom Layer w6: J2.76 -663.83,-441.17 -684.85,-420.15 -765.41,-420.15 -775.56,-410 -865,-410 -980,-295 -980,1038.4 -644.7,1373.7 U7.7
NetJ2_86: J2.86 U7.8 | length 2127.6
  Bottom Layer w6: U7.8 -928,1215.4 -1020,1123.4 -1020,-290 -880,-430 -800,-430 -781.94,-448.06 J2.86
NetJ3_1: J3.1 pad.0@143.69,2150 pad.0@350.9,2210 R3.2 R8.2 U9.1 U9.2 U9.3 U9.4 U10.1 U10.2 U10.3 U10.4 | length 15372.7
  Top Layer w40: R8.2 -86.23,2220 43.77,2090 83.69,2090 pad.0@143.69,2150
  Mid-Layer 2 w40: pad.0@143.69,2150 150,2150 250,2250 ; J3.1 250,2574.5 250,2250 ; pad.0@350.9,2210 310.9,2250 250,2250
  Bottom Layer w6: U10.1@-639.8,846 -639.8,888.6 -478.4,1050 -103.4,1050 130,1283.4 130,1900 264.19,2024.6 266.73,2026.96 ; U9.1@-495.7,300 -495.7,367.7 -383.4,480 46.6,480 146.6,580 246.6,580 290,623.4 290,1900 271.47,2020.46 270,2030 ; U10.2@-356.5,846 -356.5,892.66 -234.16,1015 -78.4,1015 170,1263.4 170,1900 264.6,2022.97 267.26,2026.44 ; U9.2@-212.4,300 -212.4,356 -133.4,435 71.6,435 176.6,540 256.6,540 330,613.4 330,1900 273.53,2022.34 270,2030 ; U10.3@-73.2,846 -73.2,955.2 210.19,1238.59 210.19,1900 ; U9.3@70.9,300 70.9,354.3 216.6,500 286.6,500 372,585.4 372,1900 274.27,2024.56 270,2030 ; 210,1900 265.92,2021.17 268.01,2025.68 ; U10.4@210.1,846 210.1,1168.5 250,1208.4 250,1900 268.46,2020 270,2030 ; U9.4@354.2,300 354.2,492.6 410,548.4 410,1900 274.16,2026.14 270,2030
  Bottom Layer w40: pad.0@143.69,2150 R3.2@143.69,2210 ; 266.73,2026.96 267.26,2026.44 268.01,2025.68 268.46,2025.23 268.46,2020 ; 270,2030 270,2050 350.9,2130.9 pad.0@350.9,2210
NetJ3_2: J3.2 R4.2 | length 188.6
  Bottom Layer w40: J3.2 94.5,2594.63 139.32,2549.8 139.32,2460.2 R4.2
NetJ3_3: J3.3 R12.2 | length 160
  Bottom Layer w40: -5.5,2537.59 J3.3 ; R12.2 0,2527.59
NetJ3_4: J3.4 R6.2 | length 184.3
  Bottom Layer w40: R6.2 -140,2520 -105.5,2554.5 J3.4
NetJ3_13: J3.13 R1.2 | length 279.8
  Bottom Layer w20: 44.5,2590 J3.13
  Bottom Layer w40: 44.5,2590 44.5,2565.5 68.26,2541.74 R1.2
NetJ3_14: J3.14 R9.2 | length 276
  Bottom Layer w20: -55.5,2591.46 J3.14
  Bottom Layer w40: R9.2 -70,2510 -55.5,2524.5 -55.5,2591.46
NetJ3_15: J3.15 R5.2 | length 289.7
  Bottom Layer w20: -155.5,2591.39 J3.15
  Bottom Layer w40: R5.2 -207.48,2543.9 -160,2591.39
NetR3_1: pad.0@140,2340 R3.1 R4.1 U7.1 U7.2 U7.3 U7.4 U8.1 U8.2 U8.3 U8.4 | length 7270.1
  Bottom Layer w6: U7.1 -928,1982 -777,2133 20,2133 73.86,2070.16 80,2063 62.97,2065.84 20,2073 -275,2073 -368.55,1979.45 -368.55,1945.15 U7.3 ; U8.1@-783.9,1392 -783.9,1484.5 -478.4,1790 -478.4,1990 -458.4,2010 -400,2010 -317,2093 20,2093 66.8,2069.6 ; U7.2 -644.7,1980.3 -585,2040 -413,2040 -340,2113 20,2113 70.85,2070.62 ; U8.2@-500.6,1392 -500.6,1436.8 -409.4,1528 -332,1528 -293,1567 -293,1910 -150,2053 20,2053 62,2060 ; U8.3@-217.3,1392 -217.3,1442.1 -198.94,1460.46 -198.94,1952.02 -117.95,2033 20,2033 64.4,2055.2 74,2060 ; U7.4 -78.1,1975.18 -40.28,2013 20,2013 67.9,2052.92 ; U8.4 64.9,1900 20,1944.9 20,1993 70.89,2052.38 77.43,2060
  Bottom Layer w40: 62,2060 74,2060 77.43,2060 150,2060 222,2132 222,2295.09 177.09,2340 pad.0@140,2340 ; R3.1@139.13,2274.57 R4.1
NetR6_1: pad.0@-140,2340 R6.1 R8.1 R11.2 U1.1 U1.2 U1.3 U1.4 U2.1 U2.2 U2.3 U2.4 | length 6284.9
  Top Layer w6: U1.4 -969.6,1980.4 -842,2108 -273,2108 -207.72,2163.95 -204.33,2166.86 ; U2.4 -825.5,1654.5 -520,1960 -520,2014.42 -474.42,2060 -281,2060 -233,2108 -206.47,2161.07 -204.33,2165.33 -203,2168 ; U1.3 -686.3,2013.7 -610,2090 -271,2090 -253,2108 -207.48,2162.62 -204.33,2166.4 ; U2.3 -542.2,1436.8 -451,1528 -363,1528 -253.26,1637.74 -253.26,1989.19 -193,2049.45 -193,2108 -201.74,2160.43 -203,2168 ; U1.2 -311,2030 -260,2030 -213,2077 -213,2108 -204.33,2160 ; U2.2 -258.9,1442.1 -190.89,1510.11 -190.89,2019.11 -173,2037 -173,2108 -200.07,2162.13 ; U1.1 -119.7,1969.7 -153,2003 -153,2108 -199.61,2163.93 -203,2168 ; U2.1 24.4,1950.6 -133,2108 -199.82,2165.27 -203,2168
  Top Layer w40: -204.33,2160 -204.33,2165.33 -204.33,2166.4 -204.33,2166.86 -204.33,2235.24 -159.57,2280 R8.1 -139.77,2339.77 -140,2340 -140,2390 R11.2
  Bottom Layer w40: pad.0@-140,2340 R6.1
NetR11_1: pad.0@0,2340 R11.1 R12.1 U3.1 U3.2 U3.3 U3.4 U4.1 U4.2 U4.3 U4.4 | length 15940.1
  Top Layer w6: U3.4 -681.4,888.6 -520,1050 -145,1050 130,1325 130,2050 270,2180 ; U4.4 -537.3,367.7 -425,480 5,480 105,580 205,580 290,665 290,2050 270,2180 ; U3.3 -398.1,892.66 -275.76,1015 -120,1015 170,1305 170,2050 270,2180 ; U4.3 -254,356 -175,435 30,435 135,540 215,540 330,655 330,2050 270,2180 ; U3.2 -114.8,955.2 210,1280 210,2050 270,2180 ; U4.2 29.3,354.3 175,500 245,500 372,627 372,2050 270,2180 ; U3.1 168.5,875.6 250,957.1 250,2050 270,2180 ; U4.1 312.6,312.6 410,410 410,2050 270,2180
  Top Layer w40: R11.1 -28.04,2430 0,2401.96 0,2340 0,2320 40,2280 180,2280 270,2190 270,2180
  Bottom Layer w40: pad.0@0,2340 R12.1
pads on no net: J1.1 J1.2 J1.11 J1.12 J1.13 J1.14 J1.19 J1.20 J1.27 J1.28 J1.35 J1.36 J1.37 J1.38 J1.39 J1.40 J1.41 J1.42 J1.47 J1.48 J1.49 J1.50 J1.55 J1.56 J1.57 J1.58 J1.59 J1.60 J1.61 J1.62 J1.63 J1.64 J1.65 J1.66 J1.67 J1.68 J1.69 J1.70 J1.71 J1.72 J1.73 J1.74 J1.75 J1.76 J1.77 J1.78 J1.79 J1.80 J1.81 J1.82 J1.83 J1.84 J1.85 J1.86 J1.87 J1.88 J1.89 J1.90 J2.1 J2.2 J2.3 J2.4 J2.5 J2.6 J2.7 J2.8 J2.9 J2.10 J2.11 J2.12 J2.21 J2.22 J2.23 J2.24 J2.25 J2.26 J2.27 J2.28 J2.31 J2.32 J2.33 J2.34 J2.39 J2.40 J2.41 J2.42 J2.43 J2.44 J2.45 J2.46 J2.47 J2.48 J2.49 J2.50 J2.51 J2.52 J2.53 J2.54 J2.65 J2.66 J2.67 J2.68 J2.69 J2.70 J2.77 J2.78 J2.79 J2.80 J2.81 J2.82 J2.83 J2.84 J2.87 J2.88 J2.89 J2.90 J3.5 J3.6 J3.7 J3.8 J3.9 J3.10 J3.11 J3.16 J3.17 J3.18 J3.19 J3.20 J3.21 J3.MH1 J3.MH2

## Polygon pours and split planes (outlines as drawn)
no net on Mechanical 1 "TopOverlay-No Net" (none): -1150,2845 -1150,-1000 540,-1000 540,2845
GND on Internal Plane 1 (split plane): 519.9,-979.9 -1129.9,-979.9 -1129.9,2824.9 519.9,2824.9
GND on Internal Plane 2 (split plane): 519.9,-979.9 -1129.9,-979.9 -1129.9,2824.9 519.9,2824.9

## Other copper
Top Layer:
  text "Top set or bottom set of mounting holes 40mils to tight" at -1590,680 h60

## Silkscreen, mask and mechanical layers (free items; w line width, h text height)
Top Overlay:
  text "McGill" at -730,2395 h30
  text "Cosmology" at -810,2350 h30
  text "LCBoard - McGill Cosmology - June 2014" at -870,-880 h30
  text "Amy Bender, Adam Gilbert" at -690,-940 h30

## Text inside footprints (layer, text, board x,y; h text height)
U1: Top Overlay "1" at -4.7,1943 h30 r270; Top Overlay "8" at 25.3,1453 h30 r90
U2: Top Overlay "1" at 139.4,1397 h30 r270; Top Overlay "8" at 169.4,907 h30 r90
U3: Top Overlay "8" at 313.5,361 h30 r90; Top Overlay "1" at 283.5,851 h30 r270
U4: Top Overlay "8" at 457.6,-185 h30 r90; Top Overlay "1" at 427.6,305 h30 r270
U7: Bottom Overlay "1" at -1043,1943 h30 r90; Bottom Overlay "8" at -1073,1453 h30 r270
U8: Bottom Overlay "8" at -930,907 h30 r270; Bottom Overlay "1" at -900,1397 h30 r90
U9: Bottom Overlay "8" at -644,-185 h30 r270; Bottom Overlay "1" at -614,305 h30 r90
U10: Bottom Overlay "1" at -757,851 h30 r90; Bottom Overlay "8" at -787,361 h30 r270